# Altium PCB PCB2.pcbdoc
Units mil, origin at the board's own origin, x right, y up, seen from the top; angles counter-clockwise.
Board outline 2990 x 1960 mil, 2 copper layers (Top Layer, Bottom Layer); 26 components, 47 nets, 145 pads, 109 vias.
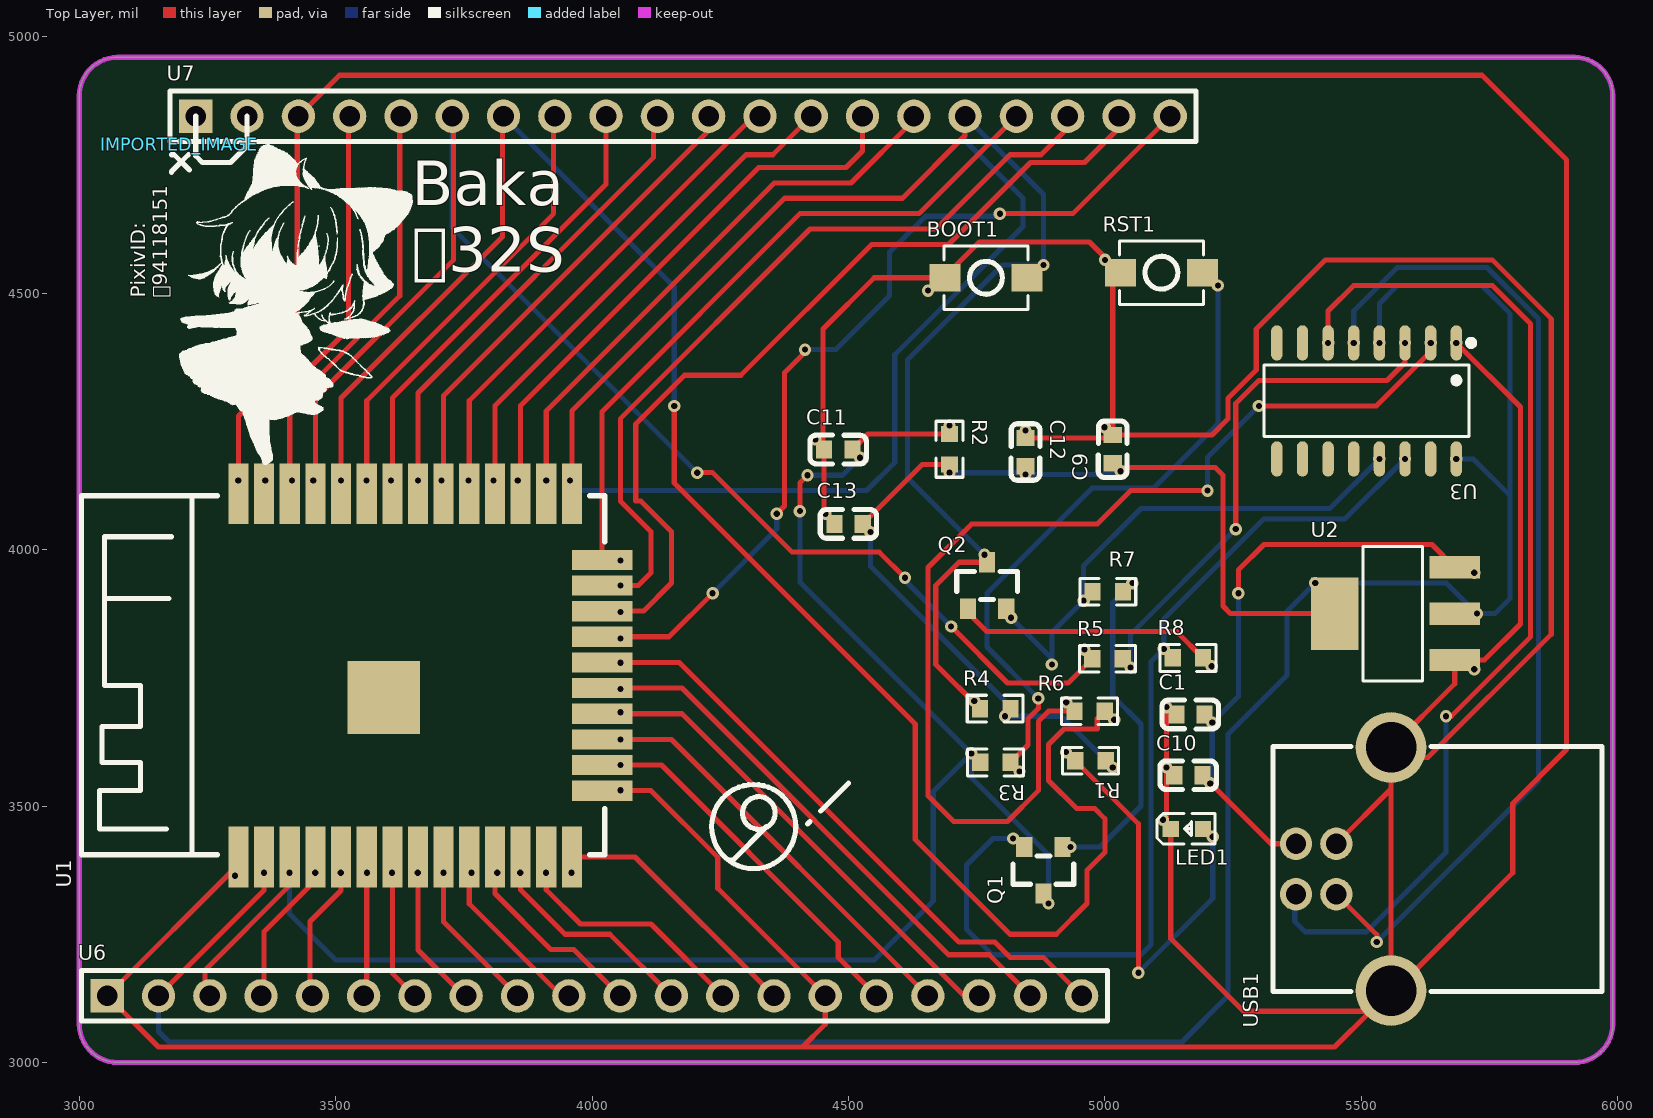
[diagram p0: Top Layer view]
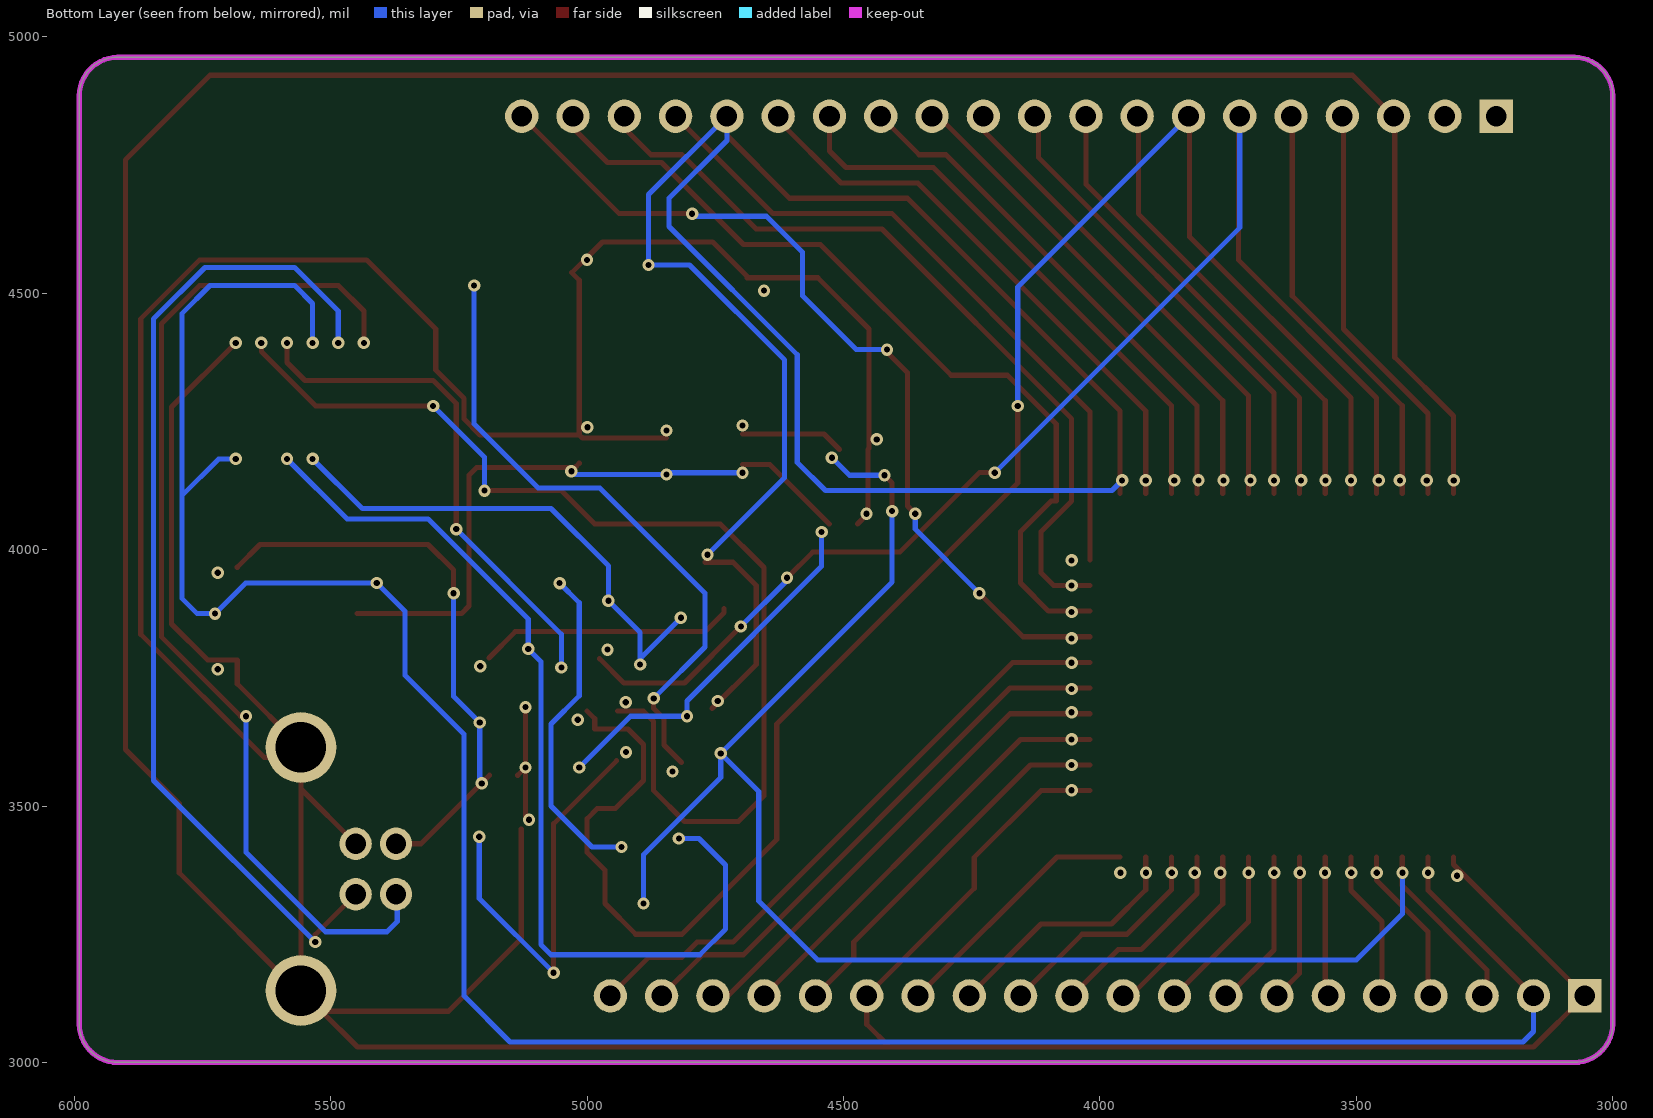
[diagram p1: Bottom Layer view, seen from below]

## Layer stack, top to bottom
Top Layer: signal copper (thickness not stored)
Dielectric: dielectric 12.6, FR-4, Dk 4.8
Bottom Layer: signal copper (thickness not stored)

## Board outline
3075,4960 5915,4960 cw(c5915,4885) 5990,4885 5990,3075 cw(c5915,3075) 5915,3000 3075,3000 cw(c3075,3075) 3000,3075 3000,4885 cw(c3075,4885)

## Components (designator, comment, footprint, x,y, rotation, side; value= is the part's Value field where it differs from the comment)
BOOT1 "Key_SMD_3x4x2" Key_SMD_3x4x2 4767.82,4530 r0 top
C1 "CAP_0603" C0603 5166.68,3678.5 r0 top
C9 "CAP_0603" C0603 5015,4196 r90 top
C10 "CAP_0603" C0603 5162.56,3560 r0 top
C11 "CAP_0603" C0603 4480,4195 r0 top
C12 "CAP_0603" C0603 4844.89,4190 r270 top
C13 "CAP_0603" C0603 4500,4050 r0 top
IMPORTED_IMAGE "IMPORTED_IMAGE" IMPORTED_IMAGE 3195,4790 r0 top
LED1 "LED_0603-R" LED_0603 5161.81,3455.76 r0 top
Q1 "S8050_SOT_NPN" S8050_SOT-23 4885,3375 r90 top
Q2 "S8050_SOT_NPN" S8050_SOT-23 4765,3930 r270 top
R1 "Res_0603" R0603 4971.84,3588.4 r180 top
R2 "Res_0603" R0603 4696.77,4195.7 r270 top
R3 "Res_0603" R0603 4786.2,3585 r180 top
R4 "Res_0603" R0603 4785.92,3690 r0 top
R5 "Res_0603" R0603 5005,3787.18 r0 top
R6 "Res_0603" R0603 4970,3685 r0 top
R7 "Res_0603" R0603 5005.39,3917.97 r0 top
R8 "Res_0603" R0603 5161.52,3788.76 r0 top
RST1 "Key_SMD_3x4x2" Key_SMD_3x4x2 5110,4540 r0 top
U1 "ESP32-S" WIRELM-SMD_ESP32-S 3665,3755 r90 top
U2 "AMS1117-3.3_C6186" SOT-223-3_L6.5-W3.4-P2.30-LS7.0-BR 5565,3875.14 r0 top
U3 "CH340C" SOP-16_L10.0-W3.9-P1.27-LS6.0-BL 5510,4290 r180 top
U6 "PM254-1-20-Z-8.5" HDR-TH_20P-P2.54-V-F-2 4004.52,3130 r0 top
U7 "PM254-1-20-Z-8.5" HDR-TH_20P-P2.54-V-F-2 4177.23,4845 r0 top
USB1 "USB-B10-BRW" USB-B-TH_USB-B10-BRW 5465,3377.27 r90 top

## Footprints (in the part's own frame and the unit in brackets; to place one, negate y for a bottom-side part, rotate by r counter-clockwise, add the part's x,y. Pads: shape width x height; smd on the part's side, far side on the other; paste and mask are expansions set on the pad)
C0603 [mm]
  rect 0.8x0.9 smd: 1(-0.7,0) 2(0.7,0)
  silkscreen extent -1.41,-0.71 1.39,0.72
HDR-TH_20P-P2.54-V-F-2 [mm]
  rect 1.65x1.65 hole 1.02: 1(-24.13,0)
  round 1.65 hole 1.02: 2(-21.59,0) 3(-19.05,0) 4(-16.51,0) 5(-13.97,0) 6(-11.43,0) 7(-8.89,0) 8(-6.35,0) 9(-3.81,0) 10(-1.27,0) 11(1.27,0) 12(3.81,0) 13(6.35,0) 14(8.89,0) 15(11.43,0) 16(13.97,0) 17(16.51,0) 18(19.05,0) 19(21.59,0) 20(24.13,0)
  silkscreen extent -25.4,-1.25 25.4,1.25
IMPORTED_IMAGE [mil]
  silkscreen extent 0,-625 455,0
Key_SMD_3x4x2 [mm]
  rect 1.53x1.36 smd: 1(-2.035,0) 2(2.035,0)
  silkscreen extent -2.08,-1.58 2.08,1.58
LED_0603 [mil]
  rect 31.5x31.5 smd: 1(-33.5,-0.4) 2(29.5,-0.2)
  silkscreen extent -61,-30 53,30
R0603 [mil]
  rect 31.75x34.02 smd: 1(-29.66,0) 2(29.66,0)
  silkscreen extent -55,-26 55,26
S8050_SOT-23 [mm]
  rect 1x0.8 smd: 1(1.15,-0.823) 2(1.15,1.077) 3(-1.15,0.127)
  silkscreen extent -0.7,-1.37 0.7,1.63
SOP-16_L10.0-W3.9-P1.27-LS6.0-BL [mm]
  oval 0.56x1.745 smd: 1(-4.445,-2.872) 2(-3.175,-2.872) 3(-1.905,-2.872) 4(-0.635,-2.872) 5(0.635,-2.872) 6(1.905,-2.872) 7(3.175,-2.872) 8(4.445,-2.872) 9(4.445,2.872) 10(3.175,2.872) 11(1.905,2.872) 12(0.635,2.872) 13(-0.635,2.872) 14(-1.905,2.872) 15(-3.175,2.872) 16(-4.445,2.872)
  silkscreen extent -5.33,-3.02 5.08,1.77
SOT-223-3_L6.5-W3.4-P2.30-LS7.0-BR [mm]
  rect 2.5x1.1 smd: 1(2.97,-2.3) 2(2.97,0) 3(2.97,2.3)
  rect 2.34x3.6 smd: 4(-2.97,0)
  silkscreen extent -1.57,-3.33 1.37,3.33
USB-B-TH_USB-B10-BRW [mm]
  round 1.6 hole 1: 1(1.25,2.355) 2(-1.25,2.355) 3(-1.25,0.355) 4(1.25,0.355)
  round 3.5 hole 2.5: 5(-6.02,-2.355) 6(6.02,-2.355)
  silkscreen extent -6.08,-12.81 6.07,3.49
WIRELM-SMD_ESP32-S [mm]
  rect 3x1 smd: 1(-9,9.005) 2(-9,7.735) 3(-9,6.465) 4(-9,5.195) 5(-9,3.925) 6(-9,2.655) 7(-9,1.385) 8(-9,0.115) 9(-9,-1.155) 10(-9,-2.425) 11(-9,-3.695) 12(-9,-4.965) 13(-9,-6.235) 14(-9,-7.505) 25(9,-7.505) 26(9,-6.235) 27(9,-4.965) 28(9,-3.695) 29(9,-2.425) 30(9,-1.155) 31(9,0.115) 32(9,1.385) 33(9,2.655) 34(9,3.925) 35(9,5.195) 36(9,6.465) 37(9,7.735) 38(9,9.005)
  rect 1x3 smd: 15(-5.715,-9.005) 16(-4.445,-9.005) 17(-3.175,-9.005) 18(-1.905,-9.005) 19(-0.635,-9.005) 20(0.635,-9.005) 21(1.905,-9.005) 22(3.175,-9.005) 23(4.445,-9.005) 24(5.715,-9.005)
  rect 3.6x3.6 smd: 39(-1.105,1.815)
  silkscreen extent -8.89,-9.13 8.89,16.78

## Via types
v1: diameter 24.02, hole 12.01, Top Layer to Bottom Layer, 109 vias

## Nets (pads, with @x,y where several pads share a name; then routed paths per layer and width w, separated by ;. In a path a pad name is that pad's centre, name@x,y a point inside that pad or via, vN(x,y) a via of type N, cw(c..) or ccw(c..) an arc to the next point about the centre after c; other vN are vias at no path point)
$1N1575: LED1.2 R1.2 | length 789.3
  Top Layer w10: R1.2 5065,3465.57 v1(5065,3175)
  Bottom Layer w10: v1(5065,3175) 5210,3320 v1(5210,3440)
  other v1: 4923.8,3605.13
$1N2232: R3.1 RST1.2 | length 1243.5
  Top Layer w10: R3.1 4850,3619.14 4850,3670 4870,3690 v1(4870,3710)
  Bottom Layer w10: v1@4865,3715 4770,3810 4770,3915 4975,4120 5095,4120 5220,4245 v1(5220,4515)
  other v1: 4833.25,3567.28
$1N2534: R5.2 U3.3 | length 1001.1
  Top Layer w10: v1(5255,4040) 5255,4285 5300,4330 5550,4330 5585,4365 v1(5585,4403.09)
  Bottom Layer w10: v1(5050,3770) 5050,3835 v1(5255,4040)
$1N2592: R6.1 U3.2 | length 2128.7
  Top Layer w10: R6.1 4890,3685 4870,3665 4870,3530 4810,3470 4705,3470 4655,3520 4655,3965 4740,4050 4985,4050 5050,4115 v1(5200,4115) ; v1(5300,4280) 5528.92,4280 5635,4386.08 v1(5635,4403.09)
  Bottom Layer w10: v1(5200,4115) 5200,4180 v1(5300,4280)
  other v1: 4924.47,3702.27
$1N3016: U1.4 U6.4 | length 314.6
  Top Layer w10: U6.4 3360,3135.48 3360,3255 3460.47,3355.47 U1.4
  other v1: 3460,3370
$1N3021: U1.5 U6.5 | length 297.6
  Top Layer w10: U6.5 3450,3134.52 3450,3275 3510.47,3335.47 U1.5
  other v1: 3510,3370
$1N3026: U1.6 U6.6 | length 273.1
  Top Layer w10: U6.6 3560.47,3135.95 U1.6
  other v1: 3561.21,3370
$1N3032: U1.7 U6.7 | length 288.9
  Top Layer w10: U1.7 3610.47,3174.05 U6.7
  other v1: 3610,3370
$1N3040: U1.8 U6.8 | length 312.3
  Top Layer w10: U1.8 3660.47,3219.53 3750,3130 U6.8
  other v1: 3660,3370
$1N3062: U1.10 U6.10 | length 359.6
  Top Layer w10: U1.10 3760.47,3309.53 3940,3130 U6.10
  other v1: 3765,3370
$1N3067: U1.11 U6.11 | length 397.8
  Top Layer w10: U1.11 3810.47,3329.53 3920,3220 3964.52,3220 U6.11
  other v1: 3815,3370
$1N3077: U1.12 U6.12 | length 443.7
  Top Layer w10: U1.12 3860.47,3336.61 3947.09,3250 4034.52,3250 U6.12
  other v1: 3860,3370
$1N3132: U1.13 U6.13 | length 493.7
  Top Layer w10: U1.13 3910.47,3336.61 3977.09,3270 4114.52,3270 U6.13
  other v1: 3910,3370
$1N3142: U1.14 U6.14 | length 506.2
  Top Layer w10: U1.14 4083.85,3400.67 U6.14
  other v1: 3960,3370
$1N3158: U1.16 U6.16 | length 739.2
  Top Layer w10: U1.16 v1(4055,3580) 4135,3580 4480,3235 4480,3204.52 U6.16
$1N3164: U1.17 U6.17 | length 842.1
  Top Layer w10: U1.17 v1(4055,3630) 4154.52,3630 U6.17
$1N3186: U1.9 U6.9 | length 330.3
  Top Layer w10: U1.9 3710.47,3274.05 U6.9
  other v1: 3710,3370
$1N3196: U1.18 U6.18 | length 962.8
  Top Layer w10: U1.18 4175,3680 4725,3130 U6.18
  other v1: 4055,3682.76
$1N3205: U1.19 U6.19 | length 1083.5
  Top Layer w10: U1.19 4175,3730 4695,3210 4774.52,3210 U6.19
  other v1: 4055,3728.2
$1N3217: U1.20 U6.20 | length 1204.2
  Top Layer w10: U1.20 4170,3780 4715,3235 4785,3235 4815,3205 4879.52,3205 U6.20
  other v1: 4055,3779.55
$1N3223: U1.21 U7.20 | length 1750.7
  Top Layer w10: U1.21 4150,3830 v1(4235,3915) ; v1(4360,4070) 4375,4085 4375,4345 4415,4385 v1(4415,4390) ; v1(4795,4655) 4937.23,4655 U7.20
  Bottom Layer w10: v1(4235,3915) 4360,4040 v1(4360,4070) ; v1(4415,4390) 4475,4390 4580,4495 4580,4580 4650,4650 4790,4650 v1(4795,4655)
  other v1: 4055,3826.96
$1N3238: U1.22 U7.19 | length 1707.2
  Top Layer w10: U1.22 4100,3880 4155,3935 4155,4035 4095,4095 4085,4095 4085,4245 4180,4340 4290,4340 4545,4595 4695,4595 4855,4755 4960,4755 5027.23,4822.23 U7.19
  other v1: 4055,3878.32
$1N3250: U1.23 U7.18 | length 1560.6
  Top Layer w10: U1.23 v1(4055,3930) 4090,3930 4115,3955 4115,4035 4055,4095 4055,4255 4425,4625 4670,4625 4815,4770 4875,4770 4927.23,4822.23 U7.18
$1N3267: U1.24 U7.17 | length 1335.6
  Top Layer w10: U1.24 4019.53,4269.53 4405,4655 4637.23,4655 U7.17
  other v1: 4055,3979.06
$1N3296: U1.26 U7.15 | length 1120.4
  Top Layer w10: U1.26 v1(3910.51,4135) 3910.47,4270.47 4355,4715 4505,4715 4627.23,4837.23 U7.15
$1N3428: U1.27 U7.14 | length 1111.4
  Top Layer w10: U1.27 3860.47,4280.47 4325,4745 4495,4745 4527.23,4777.23 U7.14
  other v1: 3855,4135
$1N3442: U1.28 U7.13 | length 1021.7
  Top Layer w10: U1.28 3810.47,4280.47 4300,4770 4352.23,4770 U7.13
  other v1: 3807.8,4135
$1N3458: U1.29 U7.12 | length 977.6
  Top Layer w10: U1.29 3760.47,4290.47 4315,4845 U7.12
  other v1: 3759.07,4135
$1N3474: U1.30 U7.11 | length 949.7
  Top Layer w10: U1.30 3710.47,4300.47 4227.23,4817.23 U7.11
  other v1: 3706.4,4135
$1N3488: U1.31 U7.10 | length 929
  Top Layer w10: U1.31 3660.47,4305.47 4120,4765 4120,4837.77 U7.10
  other v1: 3660.31,4135
$1N3502: U1.32 U7.9 | length 908.3
  Top Layer w10: U1.32 3610.47,4295.47 4027.23,4712.23 U7.9
  other v1: 3607.63,4135
$1N3520: U1.33 U7.8 | length 887.6
  Top Layer w10: U1.33 3560.47,4290.47 3925,4655 3925,4842.77 U7.8
  other v1: 3560,4135
$1N3598: U1.36 U7.5 | length 825.5
  Top Layer w10: U1.36 3410.47,4280.47 3625,4495 3625,4842.77 U7.5
  other v1: 3415,4135
$1N3608: U1.37 U7.4 | length 804.7
  Top Layer w10: U1.37 3360.47,4265.47 3525,4430 3525,4842.77 U7.4
  other v1: 3362.69,4135
$1N3762: C1.2 C10.2 U2.3 USB1.1 | length 1137
  Top Layer w10: C10.2 5323.64,3426.48 USB1.1 ; v1(5260,3915) 5260,3960 5310,4010 5637.61,4010 U2.3
  Bottom Layer w10: v1(5205.09,3544.24) 5209.21,3548.37 v1(5209.21,3662.74) 5260,3713.53 v1(5260,3915)
  other v1: 5720,3955
$1N4447: Q1.1 R7.2 | length 643.8
  Bottom Layer w10: v1(4932.6,3420.28) 4990.28,3420.28 5070,3500 5070,3660 5015,3715 5015,3896.28 v1(5053.42,3934.7)
$1N4484: C11.2 Q1.3 R2.1 R3.2 U1.3 U6.3 | length 3442.1
  Top Layer w10: U6.3 3245,3139.52 3245,3180 3410.47,3345.47 U1.3 ; v1(4405,4075) 4405,4130 v1(4420,4145) ; C11.2 4537.92,4225.36 R2.1
  Bottom Layer w10: v1(3410,3370) 3410,3290 3500,3200 4550,3200 4665,3315 4665,3528.56 v1(4739.15,3602.72) ; v1(4405,4075) 4405,3936.87 v1(4739.15,3602.72) ; v1(4420,4145) 4488.28,4145 v1(4522.53,4179.24) ; v1(4890,3310) 4890,3405 4739.15,3555.84 v1(4739.15,3602.72)
  other v1: 4696.77,4242.05
$1N4507: Q1.2 R8.1 U3.14 | length 1871
  Bottom Layer w10: v1(4820.94,3436.83) 4781.83,3436.83 4730,3385 4730,3260 4780,3210 5070,3210 5090,3230 5090,3782.01 v1(5114.47,3806.48) 5114.47,3864.47 5310,4060 5468.09,4060 v1(5585,4176.91)
$1N4576: Q2.1 R8.2 | length 502.6
  Top Layer w10: Q2.1 4732.6,3877.4 4770,3840 5139.94,3840 R8.2
  other v1: 5208.03,3772.49
$1N4656: R5.1 U1.35 U7.6 | length 2704
  Top Layer w10: U1.35 3460.47,4295.47 3730,4565 3730,4842.23 U7.6 ; v1(4205,4150) 4235,4150 4390,3995 4560,3995 v1(4610,3945) ; v1(4700,3850) 4810,3740 4928.16,3740 R5.1
  Bottom Layer w10: U7.6 3727.23,4627.77 v1(4205,4150) ; v1(4610,3945) 4610,3940 v1(4700,3850)
  other v1: 4960,3805 3456.19,4135
$1N4689: R6.2 U1.34 U7.7 | length 3584.7
  Top Layer w10: U1.34 3510.47,4295.47 3825,4610 3825,4842.77 U7.7 ; v1(4160,4280) 4160,4130 4630,3660 4630,3435 4815,3250 4905,3250 4965,3310 4965,3375 4999.66,3409.66 4999.66,3475.34 4980,3495 4945,3495 4890,3550 4890,3620 4920,3650 4985,3650 4985,3670.34 R6.2
  Bottom Layer w10: U7.7 4160,4512.23 v1(4160,4280)
  other v1: 5018.03,3668.27 3510.18,4135
$1N4721: BOOT1.2 Q2.3 R4.1 U1.25 U7.16 | length 4209.3
  Top Layer w10: U1.25 3960.47,4270.47 4375,4685 4605,4685 4727.23,4807.23 U7.16 ; R4.1 4670,3776.26 4670,3930 4715.28,3975.28 Q2.3
  Bottom Layer w10: v1(3956.6,4135) 3976.6,4115 4535,4115 4590,4170 4590,4380 4840,4630 4840,4685 4727.23,4797.77 U7.16 4880,4692.23 v1(4880,4555) 4800,4555 4615,4370 4615,4140 v1(4765,3990)
  other v1: 4745,3705
$1N4733: Q2.2 R7.1 U3.13 | length 993.4
  Bottom Layer w10: v1(4816.94,3867.28) v1@4896.34,3787.89 ; v1(4896.34,3776) v1@4896.34,3787.89 ; v1(5535,4176.91) 5438.09,4080 5070,4080 4958.34,3968.34 v1(4958.34,3900.25) 4896.34,3838.25 v1@4896.34,3787.89
$1N5995: U3.5 USB1.3 | length 1969.8
  Top Layer w10: USB1.3 5530,3249.08 v1(5530,3235)
  Bottom Layer w10: v1(5485,4403.09) 5485,4465 5570,4550 5745,4550 5845,4450 5845,3550 v1(5530,3235)
$1N6000: U3.6 USB1.2 | length 2034.4
  Top Layer w10: v1(5435,4403.09) 5435,4465 5485,4515 5755,4515 5830,4440 5830,3830 5675,3675 v1(5665,3675)
  Bottom Layer w10: USB1.2 5370,3325.77 5370,3275 5390,3255 5510,3255 5665,3410 v1(5665,3675)
GND: BOOT1.1 C1.1 C9.2 C10.1 C11.1 C12.1 C13.1 LED1.1 RST1.1 U1.1 U1.15 U1.38 U2.1 U3.1 U6.1 U6.15 U7.3 USB1.4 USB1.5 USB1.6 | length 15064.9
  Top Layer w10: U1.1 3310.47,3385.95 U6.1 3154.52,3030 4410,3030 ; U1.38 3310.47,4260.47 3425,4375 3425,4842.77 U7.3 3507.23,4925 5735,4925 5900,4760 5900,3610 5795,3505 5795,3370 5565.26,3140.26 USB1.5 ; U1.15 4115,3530 4245,3400 4245,3339.52 U6.15 4454.52,3074.52 4410,3030 ; C13.1 4452.44,4070 C11.1 4450,4197.44 4450,4430 4550,4530 BOOT1.1 4687.7,4532.7 4755,4600 4969.88,4600 RST1.1 5015,4525.12 C9.2 ; C12.1 5009,4217.56 C9.2 ; v1(5113.01,3473.36) 5120,3480.35 v1(5120,3575) ; v1(5120,3692.89) v1(5120,3575) ; LED1.1 5128.31,3241.7 5270,3100 USB1.5@5517.45,3100 ; C10.1 v1(5120,3575) ; USB1.4 5557.72,3533.17 ; v1(5685,4403.09) 5810,4278.09 5810,3855 5739.59,3784.59 U2.1 5681.93,3738.48 USB1.6 ; 4410,3030 5447.45,3030 USB1.5@5517.45,3100 ; C9.2 5208.56,4223.56 5240,4255 5240,4295 5295,4350 5295,4430 5430,4565 5755,4565 5870,4450 5870,3835 5630,3595 5576.99,3595 USB1.6 ; USB1.5@5517.45,3100 USB1.5 ; USB1.5 5557.72,3533.17 ; 5557.72,3533.17 USB1.6
  other v1: 3303.44,3364.25 4055,3530.67 5720,3766.73 4455,4070 3310,4135 4435,4215 4845,4232.39 4999.26,4238.53 4655,4505 5000,4565
VCC: C9.1 C12.2 C13.2 R1.1 R2.2 R4.2 U1.2 U2.2 U2.4 U3.4 U3.16 U6.2 | length 6886.8
  Top Layer w10: U6.2 3360.47,3335.95 U1.2 ; C13.2 4643.6,4166.04 R2.2 ; C9.1 5023.44,4160 5215,4160 5230,4145 5230,3890 5244.86,3875.14 U2.4
  Bottom Layer w10: U6.2 3154.52,3060.48 3175,3040 5150,3040 5240,3130 5240,3640 5355,3755 5355,3880 v1(5410,3935) 5665.41,3935 v1(5725.27,3875.14) 5760.14,3875.14 5790,3905 5790,4105 ; v1(4542.53,4034.24) 4542.53,3967.47 4805,3705 v1(4805,3675) 4915,3675 v1(5015,3575) ; v1(4696.77,4149.87) 4841.49,4149.87 v1(4845,4146.36) 5024.02,4146.36 v1(5030.53,4152.87) ; v1(5535,4403.09) 5535,4480 5570,4515 5735,4515 5790,4460 5790,4105 ; v1(5685,4176.91) 5718.09,4176.91 5790,4105
  other v1: 3360,3370
pads on no net: U1.39 U3.7 U3.8 U3.9 U3.10 U3.11 U3.12 U3.15 U7.1 U7.2

## Keep-outs
Board Outline Layer:
  the board outline again, w10

## Silkscreen, mask and mechanical layers (free items; w line width, h text height)
Top Silkscreen Layer:
  circle w10: c4315,3460 r82.01
  circle w10: c4325,3486.49 r31.88
  lines w10: 3180,4735 3180,4737.31 3212.69,4770 ; 3180,4770 3185,4770 3215,4740 ; 3227.23,4845 3227.23,4767.77 3240,4755 3295,4755 3327.23,4787.23 3327.23,4845 ; 4270,3395 4275,3395 4340,3460 ; 4420,3465 4425,3470 ; 4445,3490 4445.26,3490 4499.69,3544.43
  text "Baka /  32S" at 3648.52,4541.64 h86.82
  text "PixivID:  /  94118151" at 3171.26,4490.96 h28.49 r90